# EAGLE board Motor Controller (EAGLE 9.6.2)
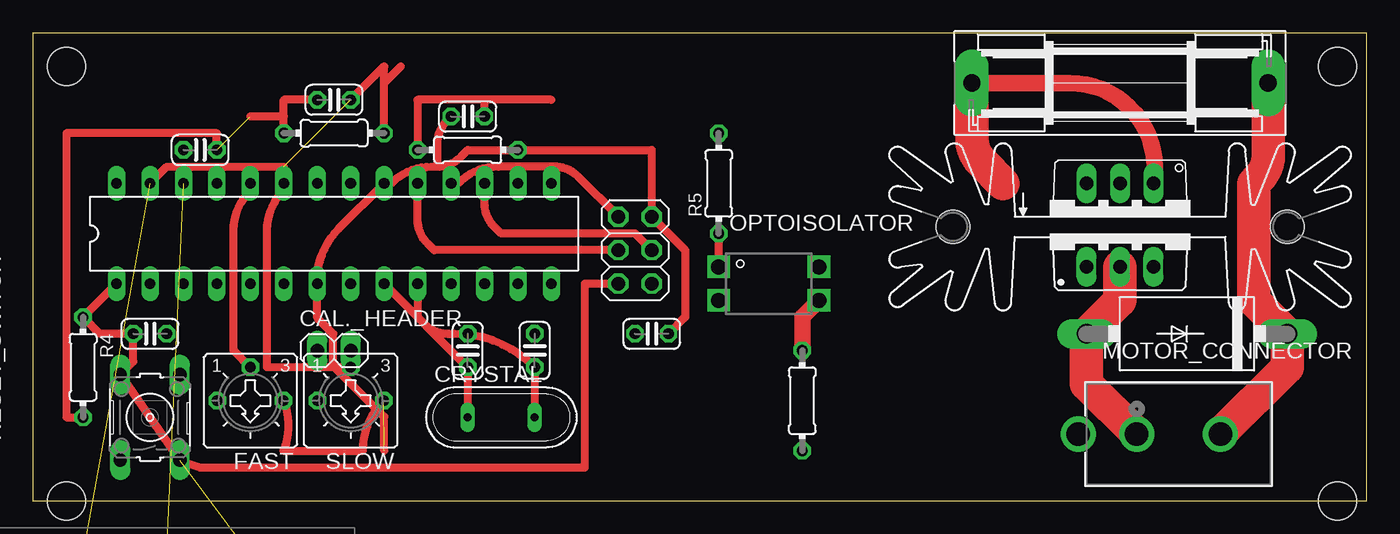
[diagram p0: board, top side]
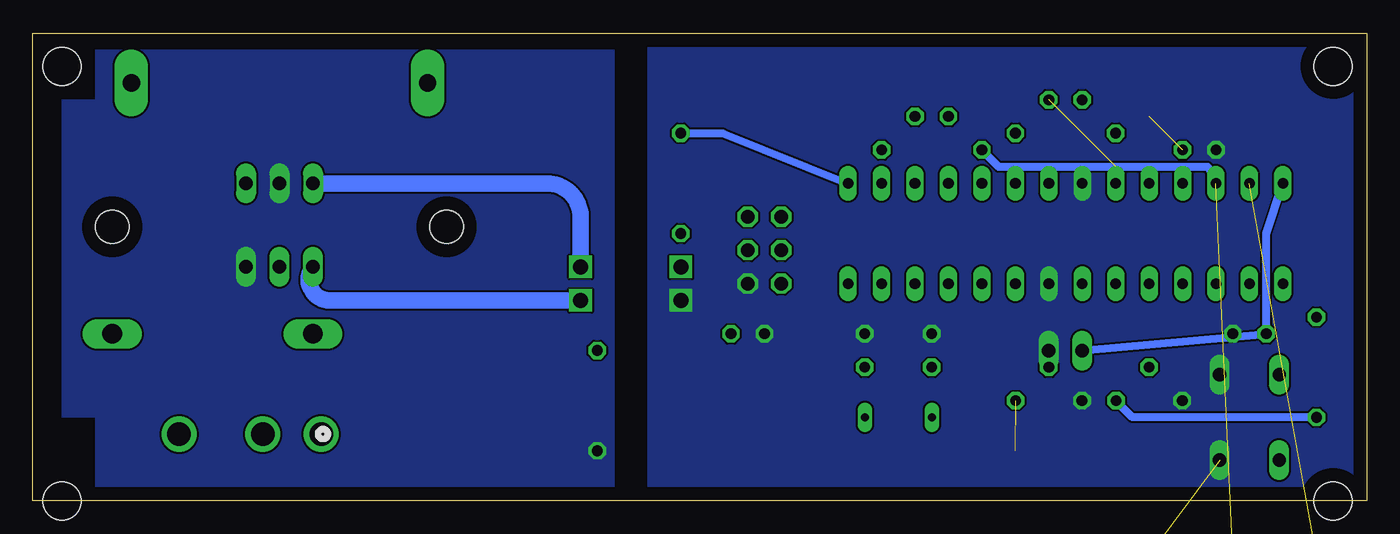
[diagram p1: board, bottom side, seen from below]

Size 101.27 x 35.55 mm. Coordinates in mm from the lower left corner, seen from the top.
Outline: 0,0 101.27,0 101.27,35.55 0,35.55 0,0
Copper layers (1*16): Top 0.035mm / dielectric 1.5mm / Bottom 0.035mm
Design rules "default *": minimum track width 6mil, minimum drill 0.35mm, track to track 6mil, track to pad 6mil, pad to pad 6mil, via to via 6mil, smd to smd 6mil, copper to edge 40mil, drill to drill 6mil, minimum pad ring 10mil, minimum via ring 8mil, stop-mask expansion 4mil, vias tented up to drill 0mil, thermal gap 0mil
Holes 2.9 mm at 2.54,33.02 99.06,33.02 99.06,0 2.54,0

## Footprints (pad centres in the part's own frame; a part is rotated, then mirrored left to right if it is on the bottom)
DO201-15 = drill 1.499 long: A 7.62,0; C -7.62,0
C025-024X044 = drill 0.813 octagon: 1 -1.27,0; 2 1.27,0
1X02 = drill 1.016 long: 1 -1.27,0; 2 1.27,0
QS = drill 0.61 long: 1 -2.54,0; 2 2.54,0
SH22,5 = drill 1.321 pad 2.54 long: 1 -11.252,0; 2 11.252,0
CT6 = drill 0.813 octagon: A 2.515,0; E -2.515,0; S 0,-2.54
DIL28-3 = drill 0.813 long: 1 -16.51,-3.81; 2 -13.97,-3.81; 3 -11.43,-3.81; 4 -8.89,-3.81; 5 -6.35,-3.81; 6 -3.81,-3.81; 7 -1.27,-3.81; 8 1.27,-3.81; 9 3.81,-3.81; 10 6.35,-3.81; 11 8.89,-3.81; 12 11.43,-3.81; 13 13.97,-3.81; 14 16.51,-3.81; 15 16.51,3.81; 16 13.97,3.81; 17 11.43,3.81; 18 8.89,3.81; 19 6.35,3.81; 20 3.81,3.81; 21 1.27,3.81; 22 -1.27,3.81; 23 -3.81,3.81; 24 -6.35,3.81; 25 -8.89,3.81; 26 -11.43,3.81; 27 -13.97,3.81; 28 -16.51,3.81
NMJ6HCD2RM = drill 1.4 pad 2.1: 1 0,0; 2 0,16.23; 3 6.35,0; 4 6.35,16.23; 5 12.7,0; 6 12.7,16.23
SK104 = hole 2.54: -12.7,-0.762; 12.7,-0.762
641963-1_TYC = drill 1.778 pad 2.286: 1 0,0; 2 6.35,0; 3 -4.445,0
SFH619A = drill 1.143 square: 1 -3.81,1.27; 2 -3.81,-1.27; 3 3.81,1.27; 4 3.81,-1.27
2X03 = drill 1.016 octagon: 1 -2.54,-1.27; 2 -2.54,1.27; 3 0,-1.27; 4 0,1.27; 5 2.54,-1.27; 6 2.54,1.27
TO220BV = drill 1.016 long: D 0,-2.54; G -2.54,-2.54; S 2.54,-2.54
0204/7 = drill 0.813 octagon: 1 -3.81,0; 2 3.81,0
B3F-10XX = drill 1.016 long: 1 -3.251,2.261; 2 3.251,2.261; 3 -3.251,-2.261; 4 3.251,-2.261
TO220V = drill 1.016 long: 1 -2.54,-2.54; 2 0,-2.54; 3 2.54,-2.54

## Placement (x,y rotation side)
1N5408  1N5408  [DO201-15]  87.63,12.7 180 top
C6  [C025-024X044]  38.1,11.43 90 top
C10  [C025-024X044]  33.02,29.21 0 top
C11  [C025-024X044]  8.89,12.7 0 top
C12  [C025-024X044]  22.86,30.48 0 top
C13  10uF  [C025-024X044]  46.99,12.7 0 top
C14  100nF  [C025-024X044]  12.7,26.67 0 top
C15  [C025-024X044]  33.02,11.43 270 top
CAL._HEADER  [1X02]  22.86,11.43 0 top
CRYSTAL  16Mhz  [QS]  35.56,6.35 0 top
F1  FUSESH22,5  [SH22,5]  82.55,31.75 180 top
FAST  [CT6]  16.51,7.62 180 top
IC1  MEGA8-P  [DIL28-3]  22.86,20.32 0 top
J1  NMJ6HCD2-RM  [NMJ6HCD2RM]  3.81,-20.32 0 top  (outside the outline)
KK1  SK104  [SK104]  82.55,21.59 0 top
MOTOR_CONNECTOR  641963-1  [641963-1_TYC]  83.82,5.08 0 top
OPTOISOLATOR  SFH619A  [SFH619A]  55.88,16.51 0 top
PROGRAMMING_HEADER  [2X03]  45.72,19.05 270 top
Q1  IRF540  [TO220BV]  82.55,20.32 0 top
R3  [0204/7]  33.02,26.67 0 top
R4  1K  [0204/7]  3.81,10.16 270 top
R5  220  [0204/7]  52.07,24.13 90 top
R6  5K  [0204/7]  58.42,7.62 270 top
R7  [0204/7]  22.86,27.94 180 top
RESET_SWITCH  [B3F-10XX]  8.89,6.35 90 top
SLOW  [CT6]  24.13,7.62 180 top
VOLTAGE_REGULATOR1  7805TV  [TO220V]  82.55,21.59 180 top

## Library data of the parts
1N5408 = diode
C6 C10-C15 = rcl; SPICEPREFIX: C
CAL._HEADER PROGRAMMING_HEADER = pinhead
CRYSTAL = special
F1 = fuse; OC_FARNELL: unknown; OC_NEWARK: unknown
FAST SLOW = pot
IC1 = atmel; OC_FARNELL: unknown; OC_NEWARK: unknown
J1 = SamacSys_Parts; DESCRIPTION: NMJ6HCD2-RM Phone Connectors 1/4" STERO JCK SWTCH FULL TRD NSE PC HORZ; HEIGHT: 15.67mm; MANUFACTURER_NAME: Neutrik; MANUFACTURER_PART_NUMBER: NMJ6HCD2-RM; MOUSER_PART_NUMBER: 568-NMJ6HCD2-RM; MOUSER_PRICE-STOCK: https://www.mouser.co.uk/ProductDetail/Neutrik/NMJ6HCD2-RM?qs=%252B86TLfaev28zLpqKj2fOGg%3D%3D
KK1 = heatsink
MOTOR_CONNECTOR = Benson; BUILT_BY: EMA_UL_Team; MANUFACTURER_PART_NUMBER: 641963-1; SOURCELIBRARY: Tyco_2012-04-26; VENDOR: TE Connectivity
OPTOISOLATOR = Benson; OPTOISOLATOR: SFH619A
Q1 = transistor-power
R3-R7 = rcl; SPICEPREFIX: R
RESET_SWITCH = switch-omron; MPN: B3F-1000; OC_FARNELL: 176432; OC_NEWARK: 36M3542
VOLTAGE_REGULATOR1 = linear

## Nets
+5V: C10.1 C12.1 C13.2 C14.2 FAST.E IC1.7 IC1.20 PROGRAMMING_HEADER.2 R3.2 R4.2 R7.2 SLOW.E
+24V: F1.2 VOLTAGE_REGULATOR1.1
CAL_HIGH_SIGNAL: FAST.S IC1.24
CAL_LOW_SIGNAL: IC1.23 SLOW.S
CALIBRATIONPIN: CAL._HEADER.1 IC1.28
GND: C6.2 C11.2 C13.1 C14.1 C15.1 CAL._HEADER.2 FAST.A IC1.8 IC1.22 J1.5 J1.6 OPTOISOLATOR.2 PROGRAMMING_HEADER.6 RESET_SWITCH.3 RESET_SWITCH.4 SLOW.A
GNDA: Q1.S R6.2 VOLTAGE_REGULATOR1.2
MISO: IC1.18 PROGRAMMING_HEADER.1
MOSI: IC1.17 PROGRAMMING_HEADER.4
MOTOR+: 1N5408.C F1.1 MOTOR_CONNECTOR.2
MOTOR-: 1N5408.A MOTOR_CONNECTOR.1 Q1.D
N$1: OPTOISOLATOR.1 R5.1
N$2: OPTOISOLATOR.4 Q1.G R6.1
N$3: OPTOISOLATOR.3 VOLTAGE_REGULATOR1.3
POWERPIN: C10.2 IC1.26 J1.3 J1.4 R3.1
PWM: IC1.15 R5.2
RESET: C11.1 IC1.1 PROGRAMMING_HEADER.5 R4.1 RESET_SWITCH.2
SCK: IC1.19 PROGRAMMING_HEADER.3
SPEEDPIN: C12.2 IC1.27 J1.1 J1.2 R7.1
XTAL1: C15.2 CRYSTAL.1 IC1.9
XTAL2: C6.1 CRYSTAL.2 IC1.10

## Tracks (layer width: path | path; a pad name or v marks a point on that pad's centre or on a via)
+5V  (2 unrouted)
  Top 0.61: IC1.20 23.23,20.69 arc45 21.59,16.73 IC1.7 21.59,13.92 22.81,12.7 22.81,10.27 26.67,6.4 26.67,3.81 | 26.67,24.35 IC1.20 | SLOW.E arc45 25.07,3.81 19.05,3.81 19.02,3.82 arc45 FAST.E | IC1.20 27.2,24.13 arc-45 30.26,25.4 30.7,25.4 | 30.7,25.4 arc45 32.49,26.14 33.02,26.67 R3.2 46.99,26.67 PROGRAMMING_HEADER.2 49.53,19.05 49.53,13.97 C13.2 | C10.1 31.44,28.9 arc45 30.7,27.11 30.7,25.4 | C12.1 19.05,30.48 19.05,29.21 | 19.05,29.21 16.51,29.21 | C14.2 13.97,27.94 2.54,27.94 2.54,6.35 R4.2 | R7.2 19.05,29.21
  Bottom 0.61: R4.2 17.78,6.35 FAST.E
+24V
  Top 1.27: F1.2 78.74,31.75 arc-100 VOLTAGE_REGULATOR1.1
  Top 2.54: F1.2 71.3,27.54 arc45 72.04,25.75 73.66,24.13
CAL_HIGH_SIGNAL
  Top 0.61: FAST.S 15.24,11.43 15.24,20.54 arc-45 16.51,23.6 IC1.24
CAL_LOW_SIGNAL
  Top 0.61: SLOW.S 17.78,10.16 17.78,20.54 arc-45 19.05,23.6 IC1.23
CALIBRATIONPIN
  Bottom 0.61: CAL._HEADER.1 7.62,12.7 7.62,20.32 IC1.28
GND  (2 unrouted)
  pour Bottom: 0,35.56 54.61,35.56 54.61,-1.27 0,-1.27
GNDA
  pour Bottom: 57.15,34.29 57.15,-1.27 96.52,-1.27 96.52,2.54 96.52,6.35 99.06,6.35 99.06,30.48 97.79,30.48 96.52,30.48 96.52,34.29
MISO
  Top 0.61: PROGRAMMING_HEADER.1 41.38,24.66 arc45 39.59,25.4 35.34,25.4 arc45 32.28,24.13 IC1.18
MOSI
  Top 0.61: PROGRAMMING_HEADER.4 45.72,20.32 35.56,20.32 35.03,20.85 arc-45 34.29,22.64 IC1.17
MOTOR+
  Top 2.54: MOTOR_CONNECTOR.2 95.25,10.16 1N5408.C 92.71,15.24 92.71,24.13 93.06,24.48 arc45 93.8,26.27 F1.1
MOTOR-
  Top 2.54: MOTOR_CONNECTOR.1 80.01,8.89 1N5408.A 82.55,15.24 Q1.D
N$1
  Top 0.61: R5.1 OPTOISOLATOR.1
N$2
  Top 1.27: OPTOISOLATOR.4 58.42,13.97 R6.1
  Bottom 1.27: OPTOISOLATOR.4 78.74,15.24 arc127 Q1.G
N$3
  Bottom 1.27: OPTOISOLATOR.3 59.69,21.59 arc-90 62.23,24.13 VOLTAGE_REGULATOR1.3
POWERPIN  (2 unrouted)
  Top 0.61: IC1.26 11.43,25.4 | 39.37,30.48 34.29,30.48 | 34.29,30.48 29.21,30.48 R3.1 | C10.2 34.29,30.48
  Bottom 0.61: R3.1 27.94,25.4 12.06,25.4 IC1.26
PWM
  Bottom 0.61: R5.2 48.9,27.94 IC1.15
RESET
  Top 0.61: R4.1 5.08,12.7 C11.1 7.62,10.59 RESET_SWITCH.2 11.19,3.04 12.7,2.54 41.91,2.54 41.91,16.51 PROGRAMMING_HEADER.5 | IC1.1 R4.1 | R4.1
SCK
  Top 0.61: PROGRAMMING_HEADER.3 30.48,19.05 29.95,19.58 arc-45 29.21,21.37 IC1.19
SPEEDPIN  (3 unrouted)
  Top 0.61: IC1.27 9.63,24.87 | 9.63,24.87 arc-45 9.63,24.87 | 9.63,24.87 10.16,25.4 19.05,25.4 | C12.2 26.67,33.02 26.67,31.75 | 26.67,31.75 27.94,33.02 | R7.1 26.67,31.75
XTAL1
  Top 0.61: IC1.9 C15.2 CRYSTAL.1
XTAL2
  Top 0.61: CRYSTAL.2 C6.1 arc45 31.97,12.7 31.53,12.7 arc-45 29.74,13.44 29.21,13.97 IC1.10